# EAGLE board avrshift-irlml2 (EAGLE 6.6.0)
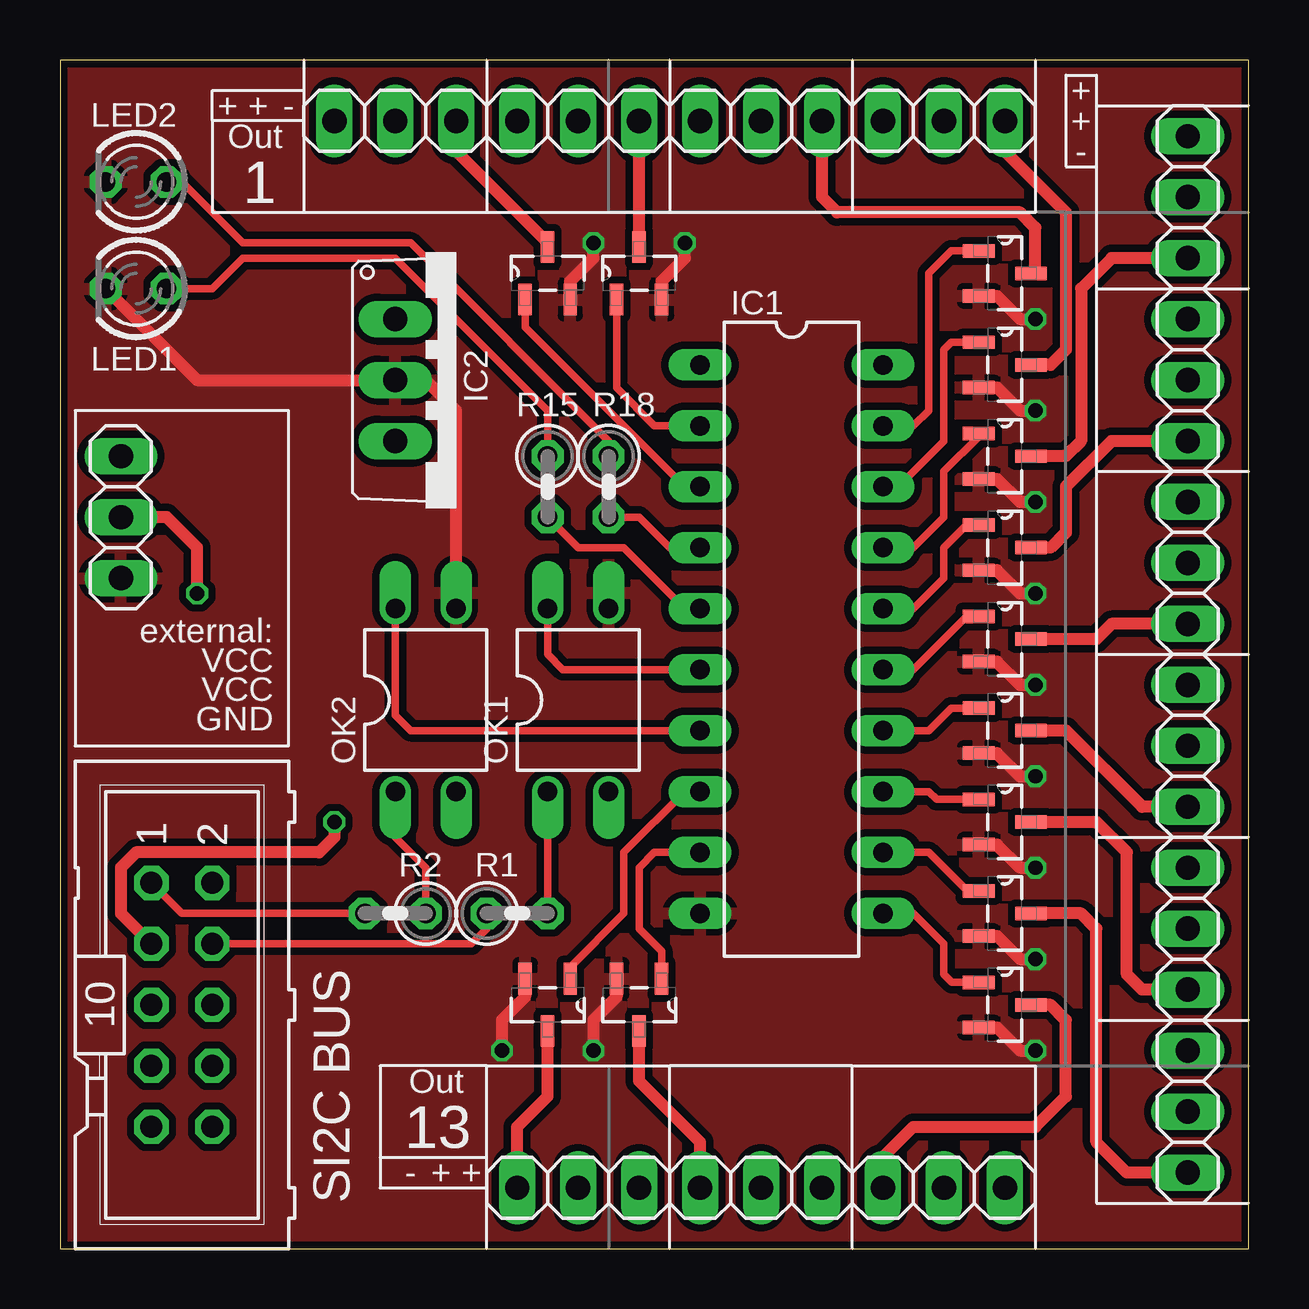
[diagram p0: board, top side]
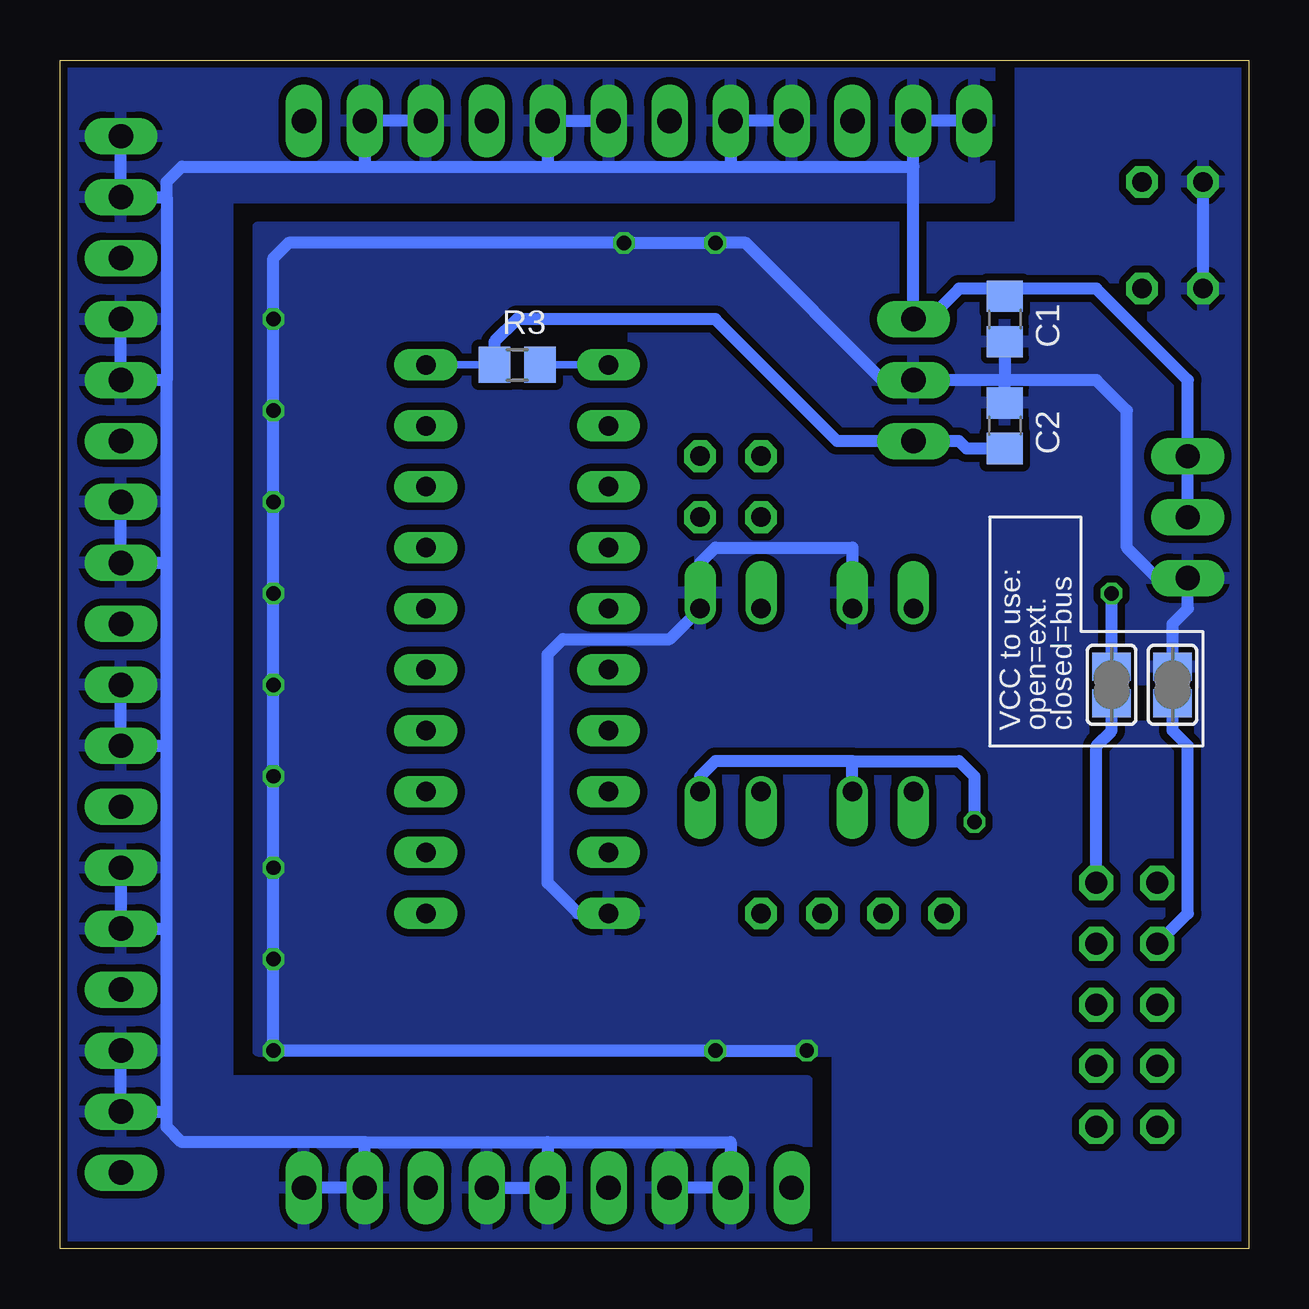
[diagram p1: board, bottom side, seen from below]

Size 49.53 x 49.53 mm. Coordinates in mm from the lower left corner, seen from the top.
Outline: 0,0 49.53,0 49.53,49.53 0,49.53 0,0
Copper layers (1*16): Top 0.035mm / dielectric 1.5mm / Bottom 0.035mm
Design rules "dirt_cheap_dirty_boards.v1 *": minimum track width 5mil, minimum drill 12mil, track to track 5mil, track to pad 5mil, pad to pad 5mil, via to via 5mil, smd to smd 0mil, copper to edge 10mil, drill to drill 10mil, minimum pad ring 10mil, minimum via ring 6mil, stop-mask expansion 2mil, vias tented up to drill 25mil, thermal gap 10mil
Net classes: 0 default: clearance 0.205 mm

## Footprints (pad centres in the part's own frame; a part is rotated, then mirrored left to right if it is on the bottom)
C0805 = smd 1.3 x 1.5: 1 -0.95,0; 2 0.95,0
DIL20 = drill 0.813 long: 1 -11.43,-3.81; 2 -8.89,-3.81; 3 -6.35,-3.81; 4 -3.81,-3.81; 5 -1.27,-3.81; 6 1.27,-3.81; 7 3.81,-3.81; 8 6.35,-3.81; 9 8.89,-3.81; 10 11.43,-3.81; 11 11.43,3.81; 12 8.89,3.81; 13 6.35,3.81; 14 3.81,3.81; 15 1.27,3.81; 16 -1.27,3.81; 17 -3.81,3.81; 18 -6.35,3.81; 19 -8.89,3.81; 20 -11.43,3.81
TO220V = drill 1.016 long: 1 -2.54,-2.54; 2 0,-2.54; 3 2.54,-2.54
1X03 = drill 1.016 long: 1 -2.54,0; 2 0,0; 3 2.54,0
LED3MM = drill 0.813 octagon: A -1.27,0; K 1.27,0
DIL04 = drill 0.813 offset: 1 -1.27,-3.81; 2 1.27,-3.81; 3 1.27,3.81; 4 -1.27,3.81
0207/2V = drill 0.813 octagon: 1 -1.27,0; 2 1.27,0
R0805 = smd 1.3 x 1.5: 1 -0.95,0; 2 0.95,0
SJ = smd 1.168 x 1.6: 1 -0.762,0; 2 0.762,0
ML10 = drill 0.914 octagon: 1 -5.08,-1.27; 2 -5.08,1.27; 3 -2.54,-1.27; 4 -2.54,1.27; 5 0,-1.27; 6 0,1.27; 7 2.54,-1.27; 8 2.54,1.27; 9 5.08,-1.27; 10 5.08,1.27
SOT95P240X112-3N = smd 1.321 x 0.559: 1 -1.092,0.94; 2 -1.092,-0.94; 3 1.092,0

## Placement (x,y rotation side)
C1  330nF  [C0805]  10.16,38.73 270 bottom
C2  100nF  [C0805]  10.16,34.29 90 bottom
IC1  AT90S2313P  [DIL20]  30.48,25.4 270 top
IC2  7805TV  [TO220V]  16.51,36.2 270 top
JP1  PWR  [1X03]  2.54,30.48 90 top
JP2  [1X03]  13.97,46.99 180 top
JP3  [1X03]  21.59,46.99 180 top
JP4  [1X03]  29.21,46.99 180 top
JP5  [1X03]  36.83,46.99 180 top
JP6  [1X03]  46.99,43.81 90 top
JP7  [1X03]  46.99,36.2 90 top
JP8  [1X03]  46.99,28.57 90 top
JP9  [1X03]  46.99,20.95 90 top
JP10  [1X03]  46.99,13.34 90 top
JP11  [1X03]  46.99,5.71 90 top
JP12  [1X03]  36.83,2.54 0 top
JP13  [1X03]  29.21,2.54 0 top
JP14  [1X03]  21.59,2.54 0 top
LED1  PWR  [LED3MM]  3.17,40.01 180 top
LED2  ACT  [LED3MM]  3.17,44.45 180 top
OK1  PC817  [DIL04]  21.59,22.86 0 top
OK2  PC817  [DIL04]  15.24,22.86 0 top
R1  1K  [0207/2V]  19.05,13.97 0 top
R2  1K  [0207/2V]  13.97,13.97 180 top
R3  10K  [R0805]  30.48,36.83 0 bottom
R15  470  [0207/2V]  20.32,31.75 270 top
R18  470  [0207/2V]  22.86,31.75 270 top
SJ1  BUSPWR  [SJ]  5.71,23.5 270 bottom
SJ2  BUSPWR  [SJ]  3.17,23.5 270 bottom
SV1  SI2C  [ML10]  5.08,10.16 270 top
U1  IRFML8244TRPBF  [SOT95P240X112-3N]  20.32,40.64 90 top
U2  IRFML8244TRPBF  [SOT95P240X112-3N]  24.13,40.64 90 top
U3  IRFML8244TRPBF  [SOT95P240X112-3N]  39.37,40.64 0 top
U4  IRFML8244TRPBF  [SOT95P240X112-3N]  39.37,36.83 0 top
U5  IRFML8244TRPBF  [SOT95P240X112-3N]  39.37,33.02 0 top
U6  IRFML8244TRPBF  [SOT95P240X112-3N]  39.37,29.21 0 top
U7  IRFML8244TRPBF  [SOT95P240X112-3N]  39.37,25.4 0 top
U8  IRFML8244TRPBF  [SOT95P240X112-3N]  39.37,21.59 0 top
U9  IRFML8244TRPBF  [SOT95P240X112-3N]  39.37,17.78 0 top
U10  IRFML8244TRPBF  [SOT95P240X112-3N]  39.37,13.97 0 top
U11  IRFML8244TRPBF  [SOT95P240X112-3N]  39.37,10.16 0 top
U12  IRFML8244TRPBF  [SOT95P240X112-3N]  24.13,10.16 270 top
U13  IRFML8244TRPBF  [SOT95P240X112-3N]  20.32,10.16 270 top

## Library data of the parts
C1 C2 R1-R3 R15 R18 = rcl
IC1 = atmel; OC_FARNELL: unknown; OC_NEWARK: unknown
IC2 = linear
JP1-JP14 = pinhead
LED1 LED2 = led
OK1 OK2 = optocoupler; MPN: PC817X4J000F; OC_FARNELL: 9707727; OC_NEWARK: 97K7059
SJ1 SJ2 = jumper
SV1 = con-harting-ml; OC_FARNELL: unknown; OC_NEWARK: unknown
U1-U13 = IRFML8244TRPBF; MPN: IRFML8244TRPBF; OC_FARNELL: 1857298; OC_NEWARK: 25T5496; PACKAGE: SOT-23-3; SUPPLIER: INTERNATIONAL RECTIFIER

## Nets
5V: C2.1 IC1.20 IC2.3 R3.1
AVRSCL: IC1.6 OK1.4
AVRSDA: IC1.7 OK2.4
BUSGND: OK1.2 OK2.2 SJ2.2 SV1.3
BUSVCC: SJ1.2 SV1.2
GND: C1.2 C2.2 IC1.10 IC2.2 JP1.1 LED1.K LED2.K OK1.3 OK2.3 SJ2.1 U1.2 U2.2 U3.2 U4.2 U5.2 U6.2 U7.2 U8.2 U9.2 U10.2 U11.2 U12.2 U13.2
N$1: OK1.1 R1.2
N$2: JP2.1 U1.3
N$4: OK2.1 R2.1
N$5: JP3.1 U2.3
N$6: JP4.1 U3.3
N$7: JP11.1 U10.3
N$8: LED2.A R18.1
N$9: JP12.1 U11.3
N$10: LED1.A R15.1
N$11: JP10.1 U9.3
N$12: JP9.1 U8.3
N$13: JP8.1 U7.3
N$14: JP7.1 U6.3
N$15: JP6.1 U5.3
N$17: JP13.1 U12.3
N$18: JP14.1 U13.3
N$21: IC1.4 R18.2
N$25: JP5.1 U4.3
N$33: IC1.5 R15.2
OUT1: IC1.3 U1.1
OUT2: IC1.2 U2.1
OUT3: IC1.19 U3.1
OUT4: IC1.18 U4.1
OUT5: IC1.17 U5.1
OUT6: IC1.16 U6.1
OUT7: IC1.15 U7.1
OUT8: IC1.14 U8.1
OUT9: IC1.13 U9.1
OUT10: IC1.12 U10.1
OUT11: IC1.11 U11.1
OUT12: IC1.9 U12.1
OUT13: IC1.8 U13.1
RESET: IC1.1 R3.2
SCL: R1.1 SV1.4
SDA: R2.2 SV1.1
VCC: C1.1 IC2.1 JP1.2 JP1.3 JP2.2 JP2.3 JP3.2 JP3.3 JP4.2 JP4.3 JP5.2 JP5.3 JP6.2 JP6.3 JP7.2 JP7.3 JP8.2 JP8.3 JP9.2 JP9.3 JP10.2 JP10.3 JP11.2 JP11.3 JP12.2 JP12.3 JP13.2 JP13.3 JP14.2 JP14.3 SJ1.1

## Tracks (layer width: path | path; a pad name or v marks a point on that pad's centre or on a via)
5V
  Bottom 0.305: R3.1 IC1.20
  Bottom 0.508: C2.1 11.75,33.34 12.06,33.66 IC2.3 17.14,33.66 22.23,38.73 30.48,38.73 31.43,37.78 R3.1
AVRSCL
  Top 0.305: IC1.6 20.95,24.13 20.32,24.77 OK1.4
AVRSDA
  Top 0.305: OK2.4 13.97,22.23 14.61,21.59 IC1.7
BUSGND  (via drill 0.6)
  Top 0.508: v11.43,17.78 11.43,17.14 10.79,16.51 3.17,16.51 2.54,15.88 2.54,13.97 SV1.3
  Bottom 0.508: SV1.3 2.54,13.97 2.54,20.95 3.17,21.59 SJ2.2 | OK2.2 16.51,20.32 | 16.51,20.32 22.23,20.32 22.86,19.68 OK1.2 | 16.51,20.32 12.06,20.32 11.43,19.68 v11.43,17.78
BUSVCC
  Bottom 0.508: SV1.2 6.35,20.95 5.71,21.59 SJ1.2
GND  (via drill 0.6)
  Top 0.508: U3.2 39.04,39.7 40.01,38.73 v40.64,38.73 | U4.2 39.04,35.89 40.01,34.92 v40.64,34.92 | U5.2 39.04,32.08 40.01,31.11 v40.64,31.11 | U6.2 39.04,28.27 40.01,27.3 v40.64,27.3 | U7.2 39.04,24.46 40.01,23.5 v40.64,23.5 | U8.2 39.04,20.65 40.01,19.68 v40.64,19.68 | U9.2 39.04,16.84 40.01,15.88 v40.64,15.88 | U10.2 39.04,13.03 40.01,12.06 v40.64,12.06 | U11.2 39.04,9.22 40.01,8.26 v40.64,8.26 | U1.2 21.26,40.31 22.23,41.27 v22.23,41.91 | U2.2 25.07,40.31 26.04,41.27 v26.04,41.91 | U13.2 19.38,10.49 18.41,9.53 v18.41,8.26 | U12.2 23.19,10.49 22.23,9.53 v22.23,8.26 | LED1.K 5.71,36.2 IC2.2 15.24,36.2 16.51,34.92 OK2.3
  Bottom 0.508: LED1.K LED2.K | v18.41,8.26 v22.23,8.26 v40.64,8.26 v40.64,12.06 v40.64,15.88 v40.64,19.68 v40.64,23.5 v40.64,27.3 v40.64,31.11 v40.64,34.92 v40.64,38.73 40.64,41.27 40.01,41.91 v26.04,41.91 v22.23,41.91 20.95,41.91 15.24,36.2 IC2.2 10.16,36.2 | C2.2 10.16,36.2 | C1.2 10.16,36.2 | OK2.3 16.51,29.21 22.23,29.21 22.86,28.57 OK1.3 24.13,25.4 28.57,25.4 29.21,24.77 29.21,15.24 27.94,13.97 IC1.10 | SJ2.1 3.17,26.04 2.54,26.67 JP1.1 3.81,27.94 5.08,29.21 5.08,34.92 6.35,36.2 10.16,36.2
  pour Bottom (isolate 0.305): 0,49.53 9.53,49.53 9.53,42.55 41.27,42.55 41.27,8.26 17.14,8.26 17.14,0 0,0
  pour Top (isolate 0.305): 0,0 49.53,0 49.53,49.53 0,49.53
N$1
  Top 0.305: R1.2 OK1.1
N$2
  Top 0.508: JP2.1 16.51,45.72 20.32,41.91 U1.3
N$4
  Top 0.305: R2.1 15.24,15.88 13.97,17.14 OK2.1
N$5
  Top 0.508: U2.3 JP3.1
N$6
  Top 0.508: U3.3 40.64,40.82 40.64,42.55 40.01,43.18 32.38,43.18 31.75,43.81 JP4.1
N$7
  Top 0.508: JP11.1 44.45,3.17 43.18,4.45 43.18,13.34 42.55,13.97 U10.3
N$8
  Top 0.305: R18.1 22.86,33.66 14.61,41.91 7.62,41.91 5.08,44.45 LED2.A
N$9
  Top 0.508: JP12.1 34.29,3.81 35.56,5.08 40.64,5.08 41.91,6.35 41.91,9.53 41.27,10.16 U11.3
N$10
  Top 0.305: LED1.A 6.35,40.01 7.62,41.27 13.97,41.27 20.32,34.92 R15.1
N$11
  Top 0.508: JP10.1 45.09,10.79 44.45,11.43 44.45,16.51 43.18,17.78 U9.3
N$12
  Top 0.508: JP9.1 45.09,18.41 41.91,21.59 U8.3
N$13
  Top 0.508: JP8.1 43.81,26.04 43.18,25.4 U7.3
N$14
  Top 0.508: JP7.1 43.81,33.66 41.91,31.75 41.91,29.84 41.27,29.21 U6.3
N$15
  Top 0.508: JP6.1 43.81,41.27 42.55,40.01 42.55,33.66 41.91,33.02 U5.3
N$17
  Top 0.508: JP13.1 26.67,4.45 24.13,6.99 U12.3
N$18
  Top 0.508: JP14.1 19.05,5.08 20.32,6.35 U13.3
N$21
  Top 0.305: R18.2 24.13,30.48 25.4,29.21 IC1.4
N$25
  Top 0.508: JP5.1 39.37,45.72 41.91,43.18 41.91,37.47 41.27,36.83 U4.3
N$33
  Top 0.305: R15.2 21.59,29.21 23.5,29.21 26.04,26.67 IC1.5
OUT1
  Top 0.305: IC1.3 26.04,31.75 19.38,38.41 U1.1
OUT2
  Top 0.305: IC1.2 24.77,34.29 23.19,35.87 U2.1
OUT3
  Top 0.305: IC1.19 35.56,34.29 36.2,34.92 36.2,40.64 37.13,41.58 U3.1
OUT4
  Top 0.305: IC1.18 34.92,31.75 36.83,33.66 36.83,37.47 37.13,37.77 U4.1
OUT5
  Top 0.305: IC1.17 35.56,29.21 36.83,30.48 36.83,32.38 38.28,33.83 U5.1
OUT6
  Top 0.305: IC1.16 35.56,26.67 36.83,27.94 36.83,29.21 37.77,30.15 U6.1
OUT7
  Top 0.305: IC1.15 35.56,24.13 37.77,26.34 U7.1
OUT8
  Top 0.305: IC1.14 36.2,21.59 37.13,22.53 U8.1
OUT9
  Top 0.305: IC1.13 36.2,19.05 36.52,18.72 U9.1
OUT10
  Top 0.305: IC1.12 36.2,16.51 37.8,14.91 U10.1
OUT11
  Top 0.305: IC1.11 35.56,13.97 36.83,12.7 36.83,11.43 37.16,11.1 U11.1
OUT12
  Top 0.305: IC1.9 24.77,16.51 24.13,15.88 24.13,13.34 25.07,12.39 U12.1
OUT13
  Top 0.305: IC1.8 26.04,19.05 23.5,16.51 23.5,13.97 21.26,11.73 U13.1
RESET
  Bottom 0.305: IC1.1 R3.2
SCL
  Top 0.305: SV1.4 17.14,12.7 17.78,13.34 R1.1
SDA
  Top 0.305: R2.2 5.08,13.97 SV1.1
VCC  (via drill 0.6)
  Top 0.508: v5.71,27.3 5.71,29.21 4.45,30.48 JP1.2
  Bottom 0.508: 13.97,45.09 IC2.1 13.34,38.73 12.06,40.01 10.16,40.01 | 13.97,45.09 JP2.2 JP2.3 | 21.59,45.09 JP3.2 JP3.3 | 21.59,45.09 13.97,45.09 | 29.21,45.09 JP4.2 JP4.3 | 29.21,45.09 21.59,45.09 | 36.83,45.09 JP5.2 JP5.3 | 36.83,45.09 29.21,45.09 | 45.09,43.81 JP6.2 JP6.3 | 45.09,43.81 45.09,36.2 | 45.09,36.2 JP7.2 JP7.3 | 45.09,28.57 JP8.2 JP8.3 | 45.09,28.57 45.09,36.2 | 45.09,20.95 JP9.2 JP9.3 | 45.09,20.95 45.09,28.57 | 45.09,13.34 JP10.2 JP10.3 | 45.09,13.34 45.09,20.95 | 45.09,5.71 JP11.2 JP11.3 | 45.09,5.71 45.09,13.34 | 36.83,4.45 JP12.2 JP12.3 | 36.83,4.45 29.21,4.45 | 29.21,4.45 JP13.2 JP13.3 | 29.21,4.45 21.59,4.45 JP14.2 JP14.3 | 36.83,4.45 44.45,4.45 45.09,5.08 45.09,5.71 | JP1.2 JP1.3 2.54,36.2 6.35,40.01 10.16,40.01 | 45.09,43.81 45.09,44.45 44.45,45.09 36.83,45.09 | C1.1 10.16,40.01 | SJ1.1 v5.71,27.3
  pour Bottom (isolate 0.305): 18.41,0 18.41,6.99 42.55,6.99 42.55,43.81 10.79,43.81 10.79,49.53 49.53,49.53 49.53,0

## Text on the board
tNames: + | + | - | + | + | Out | - | 1 | external: / VCC / VCC / GND | Out | 13 | - | + | + | SI2C BUS
bNames: VCC to use: / open=ext. / closed=bus